# Altium PCB CreationByte_DevBoard_v1 PCB.PcbDoc (part 1 of 2)
Units mil, origin at the board's own origin, x right, y up, seen from the top; angles counter-clockwise.
Board outline 2480.32 x 787.4 mil, 2 copper layers (Top Layer, Bottom Layer), stack 38.583 mil thick; 69 components, 43 nets, 237 pads, 167 vias.
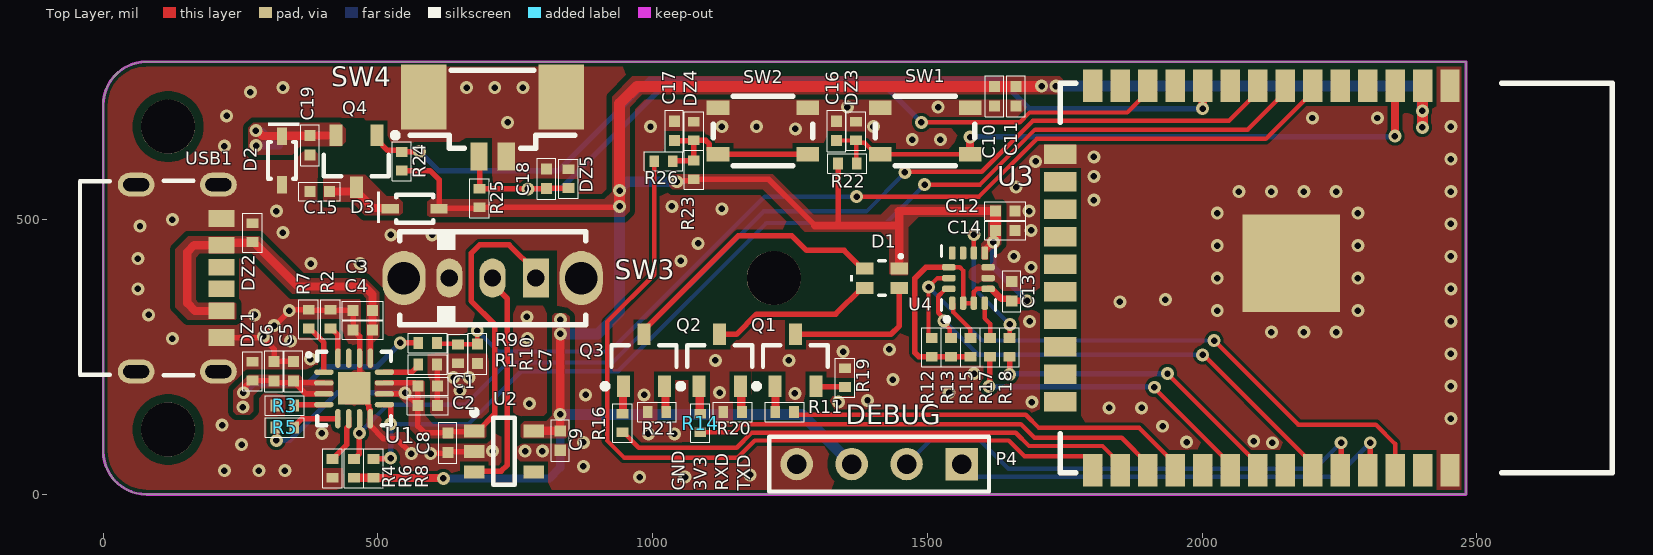
[diagram p0: Top Layer view]
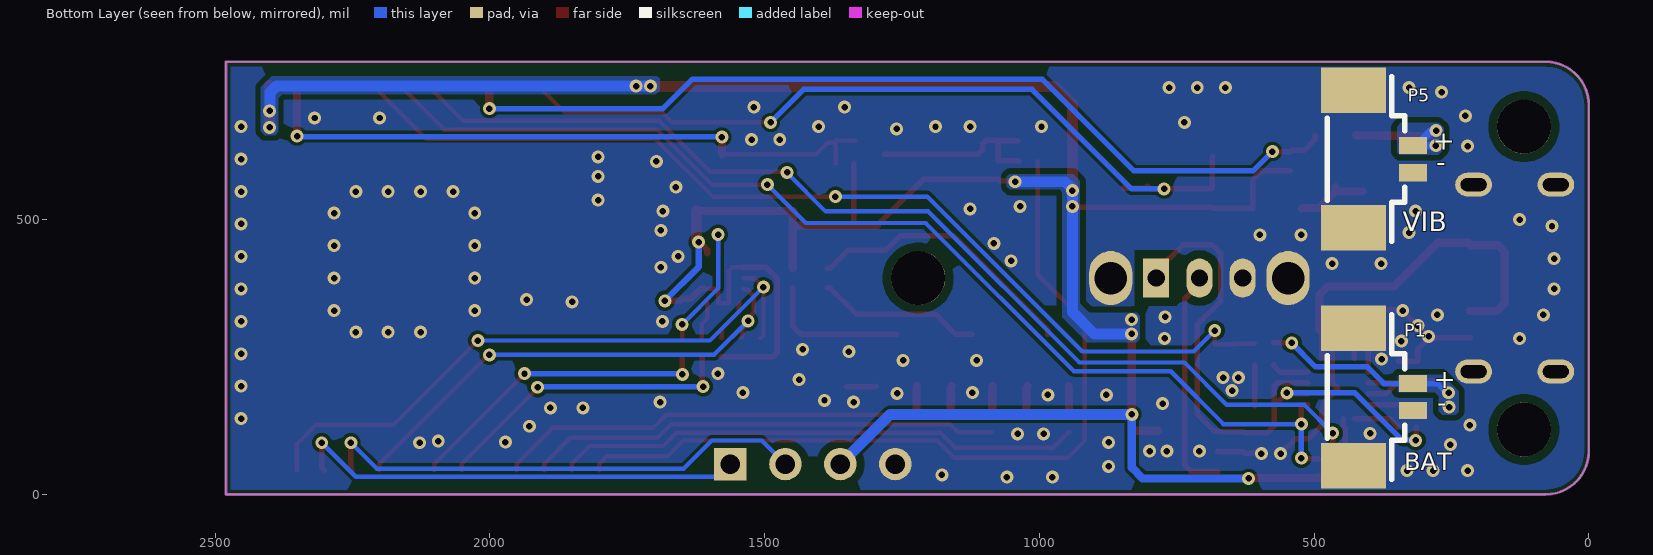
[diagram p1: Bottom Layer view, seen from below]
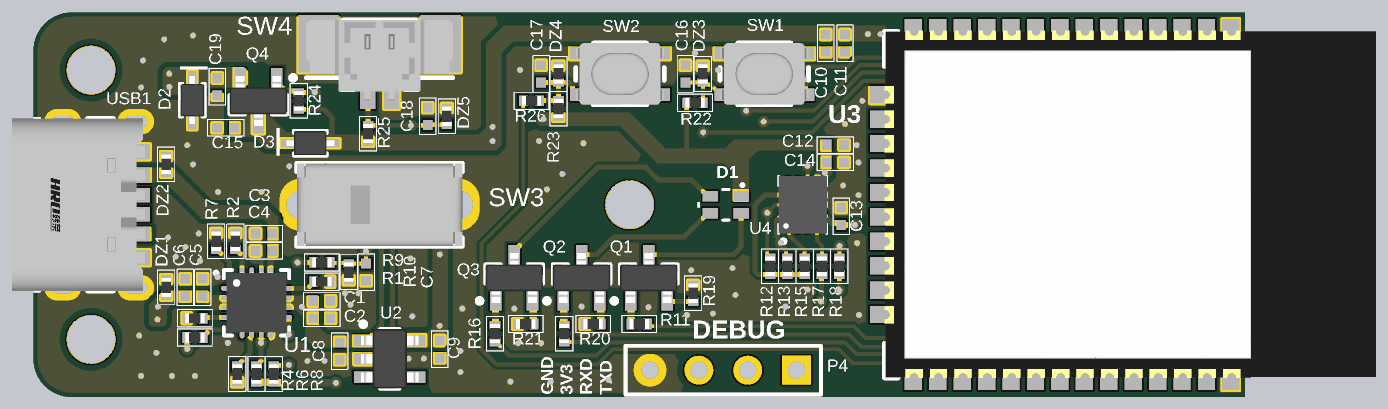
[diagram p2: 3D render of the assembled board from above, using the file's embedded part models]

## Layer stack, top to bottom
Top Solder: solder mask 0.4, Solder Resist, Dk 3.5
Top Layer: signal copper 1.378
Dielectric 1: dielectric 35.8268, FR-4, Dk 4.8
Bottom Layer: signal copper 1.378
Bottom Solder: solder mask 0.4, Solder Resist, Dk 3.5

## Board outline
78.74,0 cw(c78.74,78.74) 0,78.74 0,708.66 cw(c78.74,708.66) 78.74,787.4 2480.32,787.4 2480.32,0

## Design rules (kind name [scope] priority, off if disabled: settings)
Clearance Clearance_GND [InPolygonClass('GND')] p1: gap=6 ignorepadtopadclearanceinfootprint=FALSE except(8: SMDPad-Fill SMDPad-Poly SMDPad-Region; 10: Fill-Fill Fill-Poly Fill-Region Poly-Poly Poly-Region Region-Region; 15: THPad-Fill THPad-Poly THPad-Region)
Clearance [All] p2: gap=6 ignorepadtopadclearanceinfootprint=FALSE
ComponentClearance [All] p1: gap=10 collisioncheckmode=3 verticalgap=0 showdistances=FALSE
Height [All] p1: minheight=0 maxheight=1181.1 prefheight=500
HoleSize [All] p1: absolutevalues=TRUE maxlimit=393.7 minlimit=1 maxpercent=80.000 minpercent=20.000
HoleToHoleClearance [All] p1: gap=1 allowstackedmicrovias=TRUE
MinimumSolderMaskSliver [All] p1: minsoldermaskwidth=1
PolygonConnect [All] p1: connectstyle=Direct reliefconductorwidth=10 reliefentries=4 polygonreliefangle="90 Angle" airgapwidth=10
RoutingVias [All] p1: holewidth=11.81 width=23.62 viastyle="Through Hole" minholewidth=11.81 minwidth=23.62 maxholewidth=11.81 maxwidth=23.62
SilkToSilkClearance [All] p1: silktosilkclearance=1
SilkToSolderMaskClearance [IsPad] p1: minsilkscreentomaskgap=1 clearancetoexposedcopper=TRUE
SolderMaskExpansion [All] p1: expansion=4 istentingtop=FALSE
Width [All] p1: maxlimit=30 minlimit=8 preferedwidth=10
23 further rules are at their usual default settings.

## Classes and differential pairs
polygon class GND: GND_BOT GND_TOP
component class "Power Supply": C1 C2 C3 C4 C5 C6 C7 C8 C9 DZ1 DZ2 P1 P2 R1 R2 R3 R4 R5 R6 R7 R8 R9 R10 SW3 U1 U2 USB1
component class ESP32: C10 C11 C12 C13 C14 C15 C16 C17 C18 C19 D1 D2 D3 DZ3 DZ4 DZ5 P4 P5 Q1 Q2 Q3 Q4 R11 R12 R13 R14 R15 R16 R17 R18 R19 R20 R21 R22 R23 R24 R25 R26 SW1 SW2 SW4 U3 U4

## Components (designator, comment, footprint, x,y, rotation, side; value= is the part's Value field where it differs from the comment)
C1 "10uF" C0402M 590.55,196.85 r180 top
C2 "10uF" C0402M 590.55,161.42 r180 top
C3 "10uF" C0402M 472.44,334.65 r0 top
C4 "10uF" C0402M 472.44,299.21 r0 top
C5 "10uF" C0402M 346.46,224.41 r270 top
C6 "10uF" C0402M 311.02,224.41 r270 top
C7 "0.01uF" C0402M 681.1,255.91 r90 top
C8 "10uF" C0402M 627.09,94.1 r90 top
C9 "10uF" C0402M 831.81,98.04 r90 top
C10 "10uF" C0402M 1622.05,724.41 r90 top
C11 "0.1uF" C0402M 1661.42,724.41 r90 top
C12 "10uF" C0402M 1641.73,515.75 r180 top
C13 "0.1uF" C0402M 1653.54,370.08 r270 top
C14 "0.1uF" C0402M 1641.73,480.32 r180 top
C15 "10uF" C0402M 393.7,551.18 r0 top
C16 "0.1uF" C0402M 1334.65,661.42 r90 top
C17 "0.1uF" C0402M 1039.37,661.42 r90 top
C18 "0.1uF" C0402M 807.09,574.8 r90 top
C19 "0.1uF" C0402M 376.51,635.31 r90 top
D1 "19-237D/BHR6GHC-C01/2T" 19-237D/BHR6GHC-C01/2T 1417.32,393.7 r180 top
D2 "1N4148WS" SODFL250X70-2N 325.33,607.76 r90 top
D3 "B140WS-7" SODFL250X70-2N 566.93,519.68 r180 top
DZ1 "TPD1E10B06DPYR" R0402M 271.65,224.41 r270 top
DZ2 "TPD1E10B06DPYR" R0402M 271.65,476.38 r270 top
DZ3 "TPD1E10B06DPYR" R0402M 1370.08,661.42 r270 top
DZ4 "TPD1E10B06DPYR" R0402M 1074.8,661.42 r270 top
DZ5 "TPD1E10B06DPYR" R0402M 846.46,574.8 r270 top
P1 "0533980271" 0533980271 374.02,177.17 r90 bottom
P4 "Header 4" HDR1X4 1562.2,55.12 r180 top
P5 "0533980271" 0533980271 374.02,610.24 r90 bottom
Q1 "BC817-25-7-F" SOT95P245X110-3N 1259.84,244.09 r90 top
Q2 "BC817-25-7-F" SOT95P245X110-3N 1122.05,244.09 r90 top
Q3 "BC817-25-7-F" SOT95P245X110-3N 984.25,244.09 r90 top
Q4 "BC817-25-7-F" SOT95P245X110-3N 460.63,606.3 r270 top
R1 "1k" R0402M 590.55,236.22 r180 top
R2 "1k" R0402M 413.39,318.9 r270 top
R3 "10k" R0402M 330.71,161.42 r0 top
R4 "10k" R0402M 417.32,47.24 r90 top
R5 "10k" R0402M 330.71,122.05 r0 top
R6 "10k" R0402M 456.69,47.24 r90 top
R7 "10k" R0402M 374.02,318.9 r270 top
R8 "10k" R0402M 492.13,47.24 r90 top
R9 "100k" R0402M 590.55,275.59 r180 top
R10 "100k" R0402M 645.67,255.91 r90 top
R11 "1k" R0402M 1240.16,149.61 r180 top
R12 "10k" R0402M 1507.87,267.72 r270 top
R13 "10k" R0402M 1543.31,267.72 r270 top
R14 "1k" R0402M 1086.61,129.92 r90 top
R15 "10k" R0402M 1578.74,267.72 r270 top
R16 "1k" R0402M 944.88,129.92 r90 top
R17 "1k" R0402M 1614.17,267.72 r90 top
R18 "1k" R0402M 1649.61,267.72 r90 top
R19 "100R" R0402M 1350.39,212.6 r270 top
R20 "100R" R0402M 1145.67,149.61 r0 top
R21 "100R" R0402M 1007.87,149.61 r180 top
R22 "10k" R0402M 1354.33,602.36 r180 top
R23 "10k" R0402M 1074.8,590.55 r270 top
R24 "100k" R0402M 543.31,606.3 r270 top
R25 "10k" R0402M 685.04,539.37 r270 top
R26 "33R" R0402M 1019.69,606.3 r0 top
SW1 "PTS810SJK250SMTRLFS" PTS810SJG250SMTRLFS 1496.06,661.42 r180 top
SW2 "PTS810SJK250SMTRLFS" PTS810SJG250SMTRLFS 1200.79,661.42 r180 top
SW3 "OS102011MS2QN1" OS102011MS2QN1 708.66,393.7 r180 top locked
SW4 "0533980271" 0533980271 708.66,669.29 r0 top
U1 "BQ24074RGTR" QFN50P300X300X100_HS-17N 456.69,192.91 r0 top
U2 "XC6220B331MR-G" SOT95P280X145-5NP 729.45,78.35 r0 top
U3 "ESP32-WROOM-32D (16MB)" ESP32S 2244.09,393.7 r270 top
U4 "LSM6DSL" LSM6DSL 1574.8,393.7 r90 top
USB1 "TYPE-C-31-M-17" TYPE-C-31-M-17 137.8,393.7 r270 top locked

## Footprints (in the part's own frame and the unit in brackets; to place one, negate y for a bottom-side part, rotate by r counter-clockwise, add the part's x,y. Pads: shape width x height; smd on the part's side, far side on the other; paste and mask are expansions set on the pad)
19-237D/BHR6GHC-C01/2T [mm]
  rect 0.8x0.55 smd: 1(-0.8,-0.45) 2(-0.8,0.45) 3(0.8,0.45) 4(0.8,-0.45)
  silkscreen extent -0.89,-1.04 1.47,0.8, body extent -0.8,-0.75 0.8,0.75, height 0.34
0533980271 [mm]
  rect 2.1x3 smd: 0(-3.175,1.375) 0(3.175,1.375)
  rect 0.8x1.3 smd: 1(-0.625,-1.375) 2(0.625,-1.375)
  silkscreen extent -3.8,-1 3.8,2.6, body extent -3.82,-1.6 3.83,2.6, height 4.76
C0402M [mm] "Capacitor 0402"
  rect 0.51x0.51 smd: 1(-0.45,0) 2(0.45,0)
  silkscreen extent -0.95,-0.43 0.95,0.43, body extent -0.53,-0.28 0.53,0.27, height 0.55
ESP32S [mm]
  rect 4.5x4.5 smd: 0(-0.68,-2.08)
  rect 1.5x0.9 smd: 1(-8.9,5.26) 2(-8.9,3.99) 3(-8.9,2.72) 4(-8.9,1.45) 5(-8.9,0.18) 6(-8.9,-1.09) 7(-8.9,-2.36) 8(-8.9,-3.63) 9(-8.9,-4.9) 10(-8.9,-6.17) 11(-8.9,-7.44) 12(-8.9,-8.71) 13(-8.9,-9.98) 14(-8.9,-11.25) 25(8.89,-11.25) 26(8.89,-9.98) 27(8.89,-8.71) 28(8.89,-7.44) 29(8.89,-6.17) 30(8.89,-4.9) 31(8.89,-3.63) 32(8.89,-2.36) 33(8.89,-1.09) 34(8.89,0.18) 35(8.89,1.45) 36(8.89,2.72) 37(8.89,3.99) 38(8.89,5.26)
  rect 0.9x1.5 smd: 15(-5.72,-12.75) 16(-4.45,-12.75) 17(-3.18,-12.75) 18(-1.91,-12.75) 19(-0.64,-12.75) 20(0.63,-12.75) 21(1.9,-12.75) 22(3.17,-12.75) 23(4.44,-12.75) 24(5.71,-12.75)
  silkscreen extent -9,-12.75 9,12.75, body extent -9.05,-12.74 9.02,12.8, height 3
HDR1X4 [mm] "Connector; Header; 4 Position"
  rect 1.5x1.5 hole 0.9: 1(0,0)
  round 1.5 hole 0.9: 2(2.54,0) 3(5.08,0) 4(7.62,0)
  silkscreen extent -1.27,-1.27 8.89,1.27
LSM6DSL [mm]
  rrect50% 0.61x0.3 smd: 1(-1.16,0.75) 2(-1.16,0.25) 3(-1.16,-0.25) 4(-1.16,-0.75) 8(1.16,-0.75) 9(1.16,-0.25) 10(1.16,0.25) 11(1.16,0.75)
  rrect50% 0.3x0.61 smd: 5(-0.5,-0.91) 6(0,-0.91) 7(0.5,-0.91) 12(0.5,0.91) 13(0,0.91) 14(-0.5,0.91)
  silkscreen extent -2,-1.25 1.5,1.25, body extent -1.5,-1.25 1.5,1.25, height 0.86
OS102011MS2QN1 [mm]
  rect 1.2x1.8 hole 0.8: 1(-2,0)
  oval 1.2x1.8 hole 0.8: 2(0,0) 3(2,0)
  oval 2x2.5 hole 1.5: H1(-4.1,0) H2(4.1,0)
  silkscreen extent -4.3,-2.15 4.3,2.15, body extent -4.3,-2.15 4.3,2.15, height 8.71
PTS810SJG250SMTRLFS [mm]
  rect 1.05x0.65 smd: 1(-2.075,1.075) 2(2.075,1.075) 3(-2.075,-1.075) 4(2.075,-1.075)
  silkscreen extent -2.3,-1.6 2.3,1.6, body extent -2.29,-1.6 2.29,1.6, height 2.51
QFN50P300X300X100_HS-17N [mm] "QFN, 16-Leads, Body 3.00x3.00mm, Pitch 0.50mm, Thermal Pad 1.50x1.50mm, IPC Medium Density"
  oval 0.9x0.25 smd: 1(-1.4,0.75) 2(-1.4,0.25) 3(-1.4,-0.25) 4(-1.4,-0.75) 9(1.4,-0.75) 10(1.4,-0.25) 11(1.4,0.25) 12(1.4,0.75)
  oval 0.25x0.9 smd: 5(-0.75,-1.4) 6(-0.25,-1.4) 7(0.25,-1.4) 8(0.75,-1.4) 13(0.75,1.4) 14(0.25,1.4) 15(-0.25,1.4) 16(-0.75,1.4)
  rect 1.5x1.5 smd: 17(0,0)
  silkscreen extent -2.2,-1.7 1.7,1.7, body extent -1.57,-1.57 1.57,1.57, height 1
R0402M [mm] "Chip Resistor 0402"
  rect 0.45x0.55 smd: 1(-0.432,0) 2(0.432,0)
  silkscreen extent -0.9,-0.45 0.9,0.45, body extent -0.5,-0.25 0.5,0.25, height 0.4
SODFL250X70-2N [mm] "SODFL, 2-Leads, Body 1.25x2.50mm, IPC Medium Density"
  rect 0.8x0.45 smd: 1(-1.125,0) 2(1.125,0)
  silkscreen extent -0.85,-0.8 1.75,0.65, body extent -1.25,-0.63 1.25,0.63, height 0.7
SOT95P245X110-3N [mm] "SOT23, 3-Leads, Body 2.90x2.45mm, Pitch 0.95mm, IPC Medium Density"
  rect 1x0.6 smd: 1(-1.2,0.95) 2(-1.2,-0.95) 3(1.2,0)
  silkscreen extent -1.32,-1.5 0.7,1.92, body extent -1.3,-1.5 1.3,1.5, height 1.1
SOT95P280X145-5NP [mm] "SOT23, 5-Leads, Body 2.90x2.80mm, Pitch 0.95mm, IPC Medium Density"
  rect 0.95x0.6 smd: 1(-1.375,0.95) 2(-1.375,0) 3(-1.375,-0.95) 4(1.375,-0.95) 5(1.375,0.95)
  silkscreen extent -1.5,-1.55 0.5,1.92, body extent -1.5,-1.55 1.5,1.55, height 1.45
TYPE-C-31-M-17 [mm]
  oval 1.1x1.7 hole 0.6 slot 1.2 at 90 deg: 0(-4.32,1.825) 0(-4.32,-1.975) 0(4.32,1.825) 0(4.32,-1.975)
  rect 0.76x1.2 smd: A5(-0.5,1.975) A5(0.5,1.975) A9(1.52,1.975) B9(-1.52,1.975)
  rect 0.8x1.2 smd: A12(2.75,1.975) B12(-2.75,1.975)
  silkscreen extent -4.5,-4.57 4.5,0.67, body extent -4.47,-4.6 4.47,2.3, height 3.17

## Part data
C1 C2 C3 C4 C5 C6 C8 C9 C10 C12 C15: library part CAP_CER, "CAP CER 10UF 10V X5R 0402", Case Code (Imperial)=0402, Case Code (Metric)=1005, Manufacturer 1=Samsung, Manufacturer Part Number 1=CL05A106MP8NUB8, Max Operating Temperature=85°C, Min Operating Temperature=-55°C, Supplier Part Number 1=1276-6830-6-ND, Tolerance=20%, Voltage Rating=10V, Capacitance=10uF, Case/Package=0402, Category="Ceramic Capacitors", ComponentLink1Description=http://www.samsungsem.com/kr/support/product-search/mlcc/CL05A106MP8NUB8.jsp?src-supplier=Digi-Key, ComponentLink1URL=http://www.samsungsem.com/kr/support/product-search/mlcc/CL05A106MP8NUB8.jsp?src-supplier=Digi-Key, Length=0.039inch, Mount="Surface Mount", Mouting Technology=SMT, Packaging="Tape and Reel", Pin=2, Pricing 1="1=0.37000, 10=0.25800, 50=0.18040, 100=0.15460, 500=0.11598, 1000=0.09793, 2500=0.09278 (USD)", RoHS=Yes, RoHS Compliant=Yes, Stock 1=5372550, Supplier 1=Digi-Key, Thickness=0.035inch, Width=0.02inch
C7: library part CAP_CER, "CAP CER 10000PF 25V X7R 0402", Capacitance=10nF, Case Code (Imperial)=0402, Case Code (Metric)=1005, Dielectric=X7R, Manufacturer=Samsung, Manufacturer Part Number=CL05B103KA5NNNC, Max Operating Temperature=125°C, Min Operating Temperature=-55°C, Package Quantity=1, Supplier Part Number 1=1276-1057-1-ND, Tolerance=10%, Voltage Rating=25V, Case/Package=0402, ComponentLink1Description=https://datasheet.ciiva.com/11586/upy-gphc-x7r-6-3v-to-50v-8-11586326.pdf?src-supplier=Avnet, ComponentLink1URL=https://datasheet.ciiva.com/11586/upy-gphc-x7r-6-3v-to-50v-8-11586326.pdf?src-supplier=Avnet, ComponentLink2Description=https://datasheet.ciiva.com/17434/upy-gphc-x7r-6-3v-to-50v-8-17434572.pdf?src-supplier=Avnet+Europe, ComponentLink2URL=https://datasheet.ciiva.com/17434/upy-gphc-x7r-6-3v-to-50v-8-17434572.pdf?src-supplier=Avnet+Europe, ComponentLink3Description=https://datasheet.ciiva.com/15195/getdatasheetpartid-358612-15195635.pdf?src-supplier=Verical, ComponentLink3URL=https://datasheet.ciiva.com/15195/getdatasheetpartid-358612-15195635.pdf?src-supplier=Verical, ComponentLink4Description=https://datasheet.ciiva.com/16740/cl05b104kq5nnnc-16740683.pdf?src-supplier=Future+Electronics, ComponentLink4URL=https://datasheet.ciiva.com/16740/cl05b104kq5nnnc-16740683.pdf?src-supplier=Future+Electronics, Contact Plating=Tin, Depth=0.5mm, Height=0.5mm, Length=1mm, Mount="Surface Mount", Packaging="Tape and Reel", Pricing 1="1 = 0.10000, 10 = 0.01800, 50 = 0.00960, 100 = 0.00780, 500 = 0.00558, 1000 = 0.00439, 2500 = 0.00399, 5000 = 0.00367 (USD)", Radiation Hardening=No, RoHS=Yes, Stock 1=2714388, Supplier 1=Digi-Key, Thickness=0.022inch, Width=0.02inch
C11 C13 C14 C16 C17 C18 C19: library part CAP_CER, "CAP CER 0.1UF 50V X7R 0402", Capacitance=100nF, Case Code (Imperial)=0402, Case Code (Metric)=1005, Dielectric=X7R, Dielectric Material=Ceramic, Manufacturer=Murata, Manufacturer Part Number=GRM155R71H104KE14D, Max Operating Temperature=125°C, Min Operating Temperature=-55°C, Package Quantity=10000, Supplier Part Number 1=490-10700-1-ND, Tolerance=10%, Voltage=50V, Case/Package=0402, ComponentLink1Description=https://datasheet.ciiva.com/25741/cl10b104kb8nnnl-25741341.pdf?src-supplier=Digi-Key, ComponentLink1URL=https://datasheet.ciiva.com/25741/cl10b104kb8nnnl-25741341.pdf?src-supplier=Digi-Key, ComponentLink2Description=https://datasheet.ciiva.com/26838/getdatasheetpartid-357523-26838415.pdf?src-supplier=Verical, ComponentLink2URL=https://datasheet.ciiva.com/26838/getdatasheetpartid-357523-26838415.pdf?src-supplier=Verical, ComponentLink3Description=http://www.farnell.com/datasheets/2079156.pdf?src-supplier=Farnell, ComponentLink3URL=http://www.farnell.com/datasheets/2079156.pdf?src-supplier=Farnell, ComponentLink4Description=http://www.mouser.com/ds/2/281/c02e-2905.pdf?src-supplier=Mouser, ComponentLink4URL=http://www.mouser.com/ds/2/281/c02e-2905.pdf?src-supplier=Mouser, ComponentLink5Description=http://components.arrow.com/part/dataview/0323_07030614?src-supplier=Arrow+Europe, ComponentLink5URL=http://components.arrow.com/part/dataview/0323_07030614?src-supplier=Arrow+Europe, ComponentLink6Description=https://search.murata.co.jp/Ceramy/image/img/A01X/G101/ENG/GRM155R71H104KE14-01.pdf?src-supplier=Digi-Key, ComponentLink6URL=https://search.murata.co.jp/Ceramy/image/img/A01X/G101/ENG/GRM155R71H104KE14-01.pdf?src-supplier=Digi-Key, ComponentLink7Description=http://psearch.en.murata.com/capacitor/product/GRM155R71H104KE14%23.pdf?src-supplier=Avnet, ComponentLink7URL=http://psearch.en.murata.com/capacitor/product/GRM155R71H104KE14%23.pdf?src-supplier=Avnet, ComponentLink8Description=http://www.farnell.com/datasheets/2079156.pdf?src-supplier=Element14, ComponentLink8URL=http://www.farnell.com/datasheets/2079156.pdf?src-supplier=Element14, ComponentLink9Description=http://www.farnell.com/datasheets/2079156.pdf?src-supplier=Newark, ComponentLink9URL=http://www.farnell.com/datasheets/2079156.pdf?src-supplier=Newark, Composition=Ceramic, Depth=0.5mm, Dissipation Factor=0.025%, Height=0.5mm, Lead Free="Lead Free", Length=1mm, Material=Ceramic, Mount="Surface Mount", Packaging="Tape and Reel", Pricing 1="1 = 0.10000, 10 = 0.04600, 100 = 0.02050, 500 = 0.01464, 1000 = 0.01150, 2500 = 0.01045, 5000 = 0.00961 (USD)", REACH SVHC="No SVHC", RoHS=Yes, Stock 1=2282266, Supplier 1=Digi-Key, Termination=SMD/SMT, Thickness=0.022inch, Voltage Rating=50V, Voltage Rating (DC)=50V, Weight=0.000212oz, Width=0.5mm
D1: "LED RGB CLEAR 4SMD", Manufacturer 1=Everlight, Manufacturer Part Number 1=19-237D/BHR6GHC-C01/2T, Pricing 1="6000=0.27010, 8000=0.26740, 10000=0.26470, 12000=0.26210, 20000=0.25950, 24000=0.25690, 25000=0.25430, 30000=0.25180, 50000=0.24920 (USD)", Supplier 1="Arrow Electronics", Supplier Part Number 1=19-237D/BHR6GHC-C01/2T
D2: library part "D Schottky", "DIODE GEN PURP 75V 150MA SOD323F", Average Rectified Current=150mA, Forward Voltage=1V, Manufacturer="ON Semiconductor / Fairchild", Max Forward Surge Current (Ifsm)=2A, Max Operating Temperature=150°C, Max Repetitive Reverse Voltage (Vrrm)=75V, Min Operating Temperature=-55°C, Package Quantity=1, Peak Reverse Current=5uA, Power Dissipation=200mW, Supplier Part Number 1=1N4148WSFSCT-ND, ComponentLink1Description=http://www.mccsemi.com/up_pdf/1N4148X(SOD-523).PDF?src-supplier=Digi-Key, ComponentLink1URL=http://www.mccsemi.com/up_pdf/1N4148X(SOD-523).PDF?src-supplier=Digi-Key, ComponentLink2Description=http://www.mouser.com/ds/2/258/1N4148X(SOD-523)-349105.pdf?src-supplier=Mouser, ComponentLink2URL=http://www.mouser.com/ds/2/258/1N4148X(SOD-523)-349105.pdf?src-supplier=Mouser, ComponentLink3Description=http://www.mccsemi.com/up_pdf/1N4148X(SOD-523).PDF?src-supplier=Future+Electronics, ComponentLink3URL=http://www.mccsemi.com/up_pdf/1N4148X(SOD-523).PDF?src-supplier=Future+Electronics, ComponentLink4Description=https://datasheet.ciiva.com/16303/ds30217-16303296.pdf?src-supplier=Future+Electronics, ComponentLink4URL=https://datasheet.ciiva.com/16303/ds30217-16303296.pdf?src-supplier=Future+Electronics, ComponentLink5Description=https://datasheet.ciiva.com/27092/1538419-27092484.pdf?src-supplier=Jameco, ComponentLink5URL=https://datasheet.ciiva.com/27092/1538419-27092484.pdf?src-supplier=Jameco, ComponentLink6Description=https://datasheet.ciiva.com/912/ds30217-912801.pdf?src-supplier=Digi-Key, ComponentLink6URL=https://datasheet.ciiva.com/912/ds30217-912801.pdf?src-supplier=Digi-Key, ComponentLink7Description=https://datasheet.ciiva.com/1177/ds30217-1177089.pdf?src-supplier=Element14, ComponentLink7URL=https://datasheet.ciiva.com/1177/ds30217-1177089.pdf?src-supplier=Element14, ComponentLink8Description=https://datasheet.ciiva.com/912/ds30217-912802.pdf?src-supplier=Digi-Key, ComponentLink8URL=https://datasheet.ciiva.com/912/ds30217-912802.pdf?src-supplier=Digi-Key, ComponentLink9Description=https://datasheet.ciiva.com/912/ds30217-912803.pdf?src-supplier=Digi-Key, ComponentLink9URL=https://datasheet.ciiva.com/912/ds30217-912803.pdf?src-supplier=Digi-Key, ComponentLink10Description=https://datasheet.ciiva.com/8303/ds30217-8303132.pdf?src-supplier=Avnet, ComponentLink10URL=https://datasheet.ciiva.com/8303/ds30217-8303132.pdf?src-supplier=Avnet, ComponentLink11Description=https://datasheet.ciiva.com/25919/ds30217-25919644.pdf?src-supplier=Avnet+Europe, ComponentLink11URL=https://datasheet.ciiva.com/25919/ds30217-25919644.pdf?src-supplier=Avnet+Europe, ComponentLink12Description=https://datasheet.ciiva.com/25968/1n914bws-25968945.pdf?src-supplier=Avnet+Europe, ComponentLink12URL=https://datasheet.ciiva.com/25968/1n914bws-25968945.pdf?src-supplier=Avnet+Europe, ComponentLink13Description=https://datasheet.ciiva.com/30479/0900766b810e1cd3-30479206.pdf?src-supplier=RSComponents, ComponentLink13URL=https://datasheet.ciiva.com/30479/0900766b810e1cd3-30479206.pdf?src-supplier=RSComponents, ComponentLink14Description=https://datasheet.ciiva.com/910/1n4148ws-910381.pdf?src-supplier=Digi-Key, ComponentLink14URL=https://datasheet.ciiva.com/910/1n4148ws-910381.pdf?src-supplier=Digi-Key, ComponentLink15Description=https://datasheet.ciiva.com/15208/getdatasheetpartid-127819-15208358.pdf?src-supplier=Verical, ComponentLink15URL=https://datasheet.ciiva.com/15208/getdatasheetpartid-127819-15208358.pdf?src-supplier=Verical, ComponentLink16Description=https://datasheet.ciiva.com/8300/1n914bws-8300360.pdf?src-supplier=Avnet, ComponentLink16URL=https://datasheet.ciiva.com/8300/1n914bws-8300360.pdf?src-supplier=Avnet, ComponentLink17Description=https://datasheet.ciiva.com/910/1n4148ws-910380.pdf?src-supplier=Digi-Key, ComponentLink17URL=https://datasheet.ciiva.com/910/1n4148ws-910380.pdf?src-supplier=Digi-Key, ComponentLink18Description=https://datasheet.ciiva.com/910/1n4148ws-910382.pdf?src-supplier=Digi-Key, ComponentLink18URL=https://datasheet.ciiva.com/910/1n4148ws-910382.pdf?src-supplier=Digi-Key, Contact Plating=Tin,Matte, Element Configuration=Single, Forward Current=150mA, Height=1mm, Lead Free="Lead Free", Length=1.8mm, Manufacturer Part Number=1N4148WS, Max Reverse Voltage (DC)=75V, Mount="Surface Mount", Number of Pins=2, Packaging="Tape and Reel", Pricing 1="1 = 0.16000, 10 = 0.14000, 100 = 0.06610, 500 = 0.03920, 1000 = 0.02576 (USD)", Radiation Hardening=No, REACH SVHC="No SVHC", Recovery Time=4ns, Reverse Recovery Time=4ns, Reverse Voltage=75V, RoHS=Yes, Stock 1=252106, Supplier 1=Digi-Key, Weight=0.0276g, Width=1.35mm
D3: library part "D Schottky", "DIODE SCHOTTKY 40V 1A SOD323", Average Rectified Current=1A, Forward Voltage=620mV, Manufacturer 1=Diodes, Max Forward Surge Current (Ifsm)=3A, Max Operating Temperature=125°C, Max Repetitive Reverse Voltage (Vrrm)=40V, Max Reverse Current=50uA, Min Operating Temperature=-40°C, Natural Thermal Resistance=426°C/W, Package Quantity=3000, Supplier Part Number 1=B140WS-7DICT-ND, Category="Rectifier Diodes", ComponentLink1Description=https://datasheet.ciiva.com/13064/ds31543-56649-13064032.pdf?src-supplier=Mouser, ComponentLink1URL=https://datasheet.ciiva.com/13064/ds31543-56649-13064032.pdf?src-supplier=Mouser, ComponentLink2Description=https://datasheet.ciiva.com/18567/ds31543-18567697.pdf?src-supplier=Digi-Key, ComponentLink2URL=https://datasheet.ciiva.com/18567/ds31543-18567697.pdf?src-supplier=Digi-Key, ComponentLink3Description=https://datasheet.ciiva.com/25946/ds31543-25946915.pdf?src-supplier=Avnet+Europe, ComponentLink3URL=https://datasheet.ciiva.com/25946/ds31543-25946915.pdf?src-supplier=Avnet+Europe, Contact Plating=Tin,Matte, Element Configuration=Single, Forward Current=1A, Height=1.1mm, Length=1.8mm, Manufacturer Part Number 1=B140WS-7, Max Reverse Voltage (DC)=40V, Mount="Surface Mount", Number of Pins=2, Packaging="Tape and Reel", Peak Non-Repetitive Surge Current=3A, Pricing 1="1=0.43000, 10=0.32200, 100=0.20060, 500=0.13728, 1000=0.10560 (USD)", RoHS=Yes, RoHS Compliant=Yes, Series=-, Stock 1=30918, Supplier 1=Digi-Key, Weight=0.000173oz, Width=1.4mm
DZ1 DZ2 DZ3 DZ4 DZ5: library part "D Zener", "TVS DIODE 5.5V 14V 2X1SON", Breakdown Voltage=6V, Capacitance=12pF, Case/Package=0402, Clamping Voltage=14V, Leakage Current=100nA, Manufacturer="Texas Instruments", Max Operating Temperature=125°C, Min Operating Temperature=-40°C, Package Quantity=1, Peak Pulse Current=5A, Peak Pulse Power=90W, Power Line Protection=No, Resistor Type=Zener, Reverse Standoff Voltage=5.5V, Supplier Part Number 1=296-30406-1-ND, Test Current=1mA, ComponentLink1Description=https://datasheet.ciiva.com/26005/sllseb1b-26005840.pdf?src-supplier=Avnet+Europe, ComponentLink1URL=https://datasheet.ciiva.com/26005/sllseb1b-26005840.pdf?src-supplier=Avnet+Europe, ComponentLink2Description=https://datasheet.ciiva.com/46384/1877100-46384054.pdf?src-supplier=Element14, ComponentLink2URL=https://datasheet.ciiva.com/46384/1877100-46384054.pdf?src-supplier=Element14, ComponentLink3Description=https://datasheet.ciiva.com/14195/tpd1e10b06-14195178.pdf?src-supplier=Avnet, ComponentLink3URL=https://datasheet.ciiva.com/14195/tpd1e10b06-14195178.pdf?src-supplier=Avnet, ComponentLink4Description=https://datasheet.ciiva.com/22691/1877100-22691786.pdf?src-supplier=Element14, ComponentLink4URL=https://datasheet.ciiva.com/22691/1877100-22691786.pdf?src-supplier=Element14, ComponentLink5Description=https://datasheet.ciiva.com/2961/tpd1e10b06-2961245.pdf?src-supplier=Digi-Key, ComponentLink5URL=https://datasheet.ciiva.com/2961/tpd1e10b06-2961245.pdf?src-supplier=Digi-Key, ComponentLink6Description=https://datasheet.ciiva.com/2961/tpd1e10b06-2961246.pdf?src-supplier=Digi-Key, ComponentLink6URL=https://datasheet.ciiva.com/2961/tpd1e10b06-2961246.pdf?src-supplier=Digi-Key, ComponentLink7Description=https://datasheet.ciiva.com/6574/tpd1e10b06-6574654.pdf?src-supplier=Digi-Key, ComponentLink7URL=https://datasheet.ciiva.com/6574/tpd1e10b06-6574654.pdf?src-supplier=Digi-Key, Contact Plating=Gold, Direction=Bidirectional, Element Configuration=Single, ESD Protection=Yes, Height=0.35mm, Interface=GPIO, Lead Free="Lead Free", Length=1.1mm, Manufacturer Part Number=TPD1E10B06DPYR, Max Reverse Leakage Current=100nA, Min Breakdown Voltage=6V, Number of Bidirectional Channels=1, Number of Channels=1, Number of Pins=2, Packaging="Tape and Reel", Pricing 1="1 = 0.45000, 10 = 0.29400, 100 = 0.16380, 500 = 0.10920, 1000 = 0.07560, 5000 = 0.07350 (USD)", Radiation Hardening=No, REACH SVHC="No SVHC", RoHS=Yes, Stock 1=555750, Supplier 1=Digi-Key, Width=0.7mm, Working Voltage=5.5V
P1 P5 SW4: library part "Header 2", "CONN HEADER SMD 2POS 1.25MM", Color=Natural, Contact Resistance=20mR, Current Rating=1A, Flammability Rating="UL94 V-0", Insulation Resistance=100MR, Manufacturer 1=Molex, Manufacturer Part Number 1=53398-0271, Max Operating Temperature=85°C, Min Operating Temperature=-40°C, Package Quantity=1000, Supplier Part Number 1=WM7606CT-ND, Voltage Rating=125V, Category="Headers and Wire Housings", ComponentLink1Description=https://datasheet.ciiva.com/7167/1626130-7167520.pdf?src-supplier=Newark, ComponentLink1URL=https://datasheet.ciiva.com/7167/1626130-7167520.pdf?src-supplier=Newark, ComponentLink2Description=https://datasheet.ciiva.com/7920/1841150-7920834.pdf?src-supplier=Element14, ComponentLink2URL=https://datasheet.ciiva.com/7920/1841150-7920834.pdf?src-supplier=Element14, ComponentLink3Description=https://datasheet.ciiva.com/14156/gf116833-116846-e-14156243.pdf?src-supplier=Distrelec, ComponentLink3URL=https://datasheet.ciiva.com/14156/gf116833-116846-e-14156243.pdf?src-supplier=Distrelec, ComponentLink4Description=https://datasheet.ciiva.com/36178/1932619-36178944.pdf?src-supplier=Jameco, ComponentLink4URL=https://datasheet.ciiva.com/36178/1932619-36178944.pdf?src-supplier=Jameco, ComponentLink5Description=https://datasheet.ciiva.com/28523/1759360-28523372.pdf?src-supplier=Element14, ComponentLink5URL=https://datasheet.ciiva.com/28523/1759360-28523372.pdf?src-supplier=Element14, ComponentLink6Description=https://datasheet.ciiva.com/9468/0533980271-pcb-headers-9468512.pdf?src-supplier=Avnet, ComponentLink6URL=https://datasheet.ciiva.com/9468/0533980271-pcb-headers-9468512.pdf?src-supplier=Avnet, ComponentLink7Description=https://datasheet.ciiva.com/30229/225140533980271-pcb-headers-30229043.pdf?src-supplier=Onlinecomponents.com, ComponentLink7URL=https://datasheet.ciiva.com/30229/225140533980271-pcb-headers-30229043.pdf?src-supplier=Onlinecomponents.com, ComponentLink8Description=https://datasheet.ciiva.com/5150/0533980271-pcb-headers-146564-5150549.pdf?src-supplier=Mouser, ComponentLink8URL=https://datasheet.ciiva.com/5150/0533980271-pcb-headers-146564-5150549.pdf?src-supplier=Mouser, ComponentLink9Description=https://datasheet.ciiva.com/11746/0900766b80ab946a-11746463.pdf?src-supplier=RSComponents, ComponentLink9URL=https://datasheet.ciiva.com/11746/0900766b80ab946a-11746463.pdf?src-supplier=RSComponents, ComponentLink10Description=https://datasheet.ciiva.com/22707/1867379-22707654.pdf?src-supplier=Element14, ComponentLink10URL=https://datasheet.ciiva.com/22707/1867379-22707654.pdf?src-supplier=Element14, ComponentLink11Description=https://datasheet.ciiva.com/22683/1626130-22683563.pdf?src-supplier=Element14, ComponentLink11URL=https://datasheet.ciiva.com/22683/1626130-22683563.pdf?src-supplier=Element14, ComponentLink12Description=https://datasheet.ciiva.com/16658/0533980271-pcb-headers-16658429.pdf?src-supplier=Avnet+Europe, ComponentLink12URL=https://datasheet.ciiva.com/16658/0533980271-pcb-headers-16658429.pdf?src-supplier=Avnet+Europe, ComponentLink13Description=https://datasheet.ciiva.com/18454/70090670-18454279.pdf?src-supplier=Allied+Electronics, ComponentLink13URL=https://datasheet.ciiva.com/18454/70090670-18454279.pdf?src-supplier=Allied+Electronics, Contact Material=Bronze,Brass,Tin, Contact Plating=Tin, Contact Type="Blade Pin", Depth=4.2mm, Gender=Male, Glow Wire Compliant=Non-compliant, Housing Color=Natural, Housing Material=Nylon, LatestRevisionDate=17-Jul-2002, LatestRevisionNote="Re-released for DXP Platform.", Lead Free="Lead Free", Mount="Surface Mount", Number of Circuits=2, Number of Contacts=2, Number of Positions=2, Number of Rows=1, Orientation=Vertical, Packaging="Tape and Reel", Pitch=1.25mm, Pricing 1="1=0.53000, 10=0.44900, 100=0.34940 (USD)", Publisher="Altium Limited", Radiation Hardening=No, REACH SVHC=Unknown, RoHS=Yes, RoHS Compliant=Yes, Series=PicoBlade, Stock 1=417, Supplier 1=Digi-Key, Termination=Solder, Voltage Rating (AC)=125V, Voltage Rating (DC)=125V, Working Voltage=125V
P4: "Header, 4-Pin", LatestRevisionDate=17-Jul-2002, LatestRevisionNote="Re-released for DXP Platform.", Publisher="Altium Limited"
Q1 Q2 Q3 Q4: library part MMBT3904-7-F, "TRANS NPN 45V 500MA SOT23-3", Case/Package=SOT-23, Collector Base Voltage (VCBO)=50V, Collector Emitter Breakdown Voltage=45V, Collector Emitter Saturation Voltage=700mV, Emitter Base Voltage (VEBO)=5V, Frequency=100MHz, Manufacturer=Diodes, Max Breakdown Voltage=150V, Max Collector Current=800mA, Max Operating Temperature=150°C, Max Power Dissipation=310mW, Min Operating Temperature=-65°C, Package Quantity=3000, Power Dissipation=350mW, Supplier Part Number 1=BC817-25FDICT-ND, Collector Emitter Voltage (VCEO)=45V, ComponentLink1Description=https://datasheet.ciiva.com/15139/getdatasheetpartid-233998-15139790.pdf?src-supplier=Verical, ComponentLink1URL=https://datasheet.ciiva.com/15139/getdatasheetpartid-233998-15139790.pdf?src-supplier=Verical, Contact Plating=Tin, Element Configuration=Single, Gain Bandwidth Product=100MHz, Height=1mm, Lead Free="Lead Free", Length=3.05mm, Manufacturer 1=Diodes, Manufacturer Part Number=BC817-25-7-F, Manufacturer Part Number 1=BC817-25-7-F, Max Frequency=100MHz, Mount="Surface Mount", Number of Elements=1, Number of Pins=3, Packaging="Tape and Reel", Polarity=NPN, Pricing 1="1 = 0.20000, 10 = 0.16300, 25 = 0.13640, 100 = 0.06670, 250 = 0.06560, 500 = 0.05560, 1000 = 0.03863 (USD)", Radiation Hardening=No, REACH SVHC="No SVHC", RoHS=Yes, Stock 1=52922, Supplier 1=Digi-Key, Transition Frequency=100MHz, Weight=0.000282oz, Width=1.4mm
R1 R2 R11 R14 R16 R17 R18: library part RES_SMD, "RES SMD 1K OHM 1% 1/16W 0402", Case Code (Imperial)=0402, Case Code (Metric)=1005, Manufacturer 1=Yageo, Manufacturer Part Number 1=RC0402FR-071KL, Max Operating Temperature=155°C, Max Power Dissipation=63mW, Min Operating Temperature=-55°C, Power Rating=62.5mW, Resistance=1kR, Resistance Tolerance=1%, Resistor Type="Thick Film", Supplier Part Number 1=311-1.00KLRCT-ND, Temperature Coefficient=100ppm/°C, Voltage Rating=50V, Case/Package=0402, Category="Chip SMD Resistors", ComponentLink1Description=https://datasheet.ciiva.com/11819/0900766b80c66297-11819477.pdf?src-supplier=RSComponents, ComponentLink1URL=https://datasheet.ciiva.com/11819/0900766b80c66297-11819477.pdf?src-supplier=RSComponents, ComponentLink2Description=https://datasheet.ciiva.com/7983/1018594-7983502.pdf?src-supplier=Element14, ComponentLink2URL=https://datasheet.ciiva.com/7983/1018594-7983502.pdf?src-supplier=Element14, ComponentLink3Description=https://datasheet.ciiva.com/22747/1018594-22747513.pdf?src-supplier=Element14, ComponentLink3URL=https://datasheet.ciiva.com/22747/1018594-22747513.pdf?src-supplier=Element14, ComponentLink4Description=https://datasheet.ciiva.com/12666/pyu-rc0402-51-rohs-l-6-r-12666741.pdf?src-supplier=Mouser, ComponentLink4URL=https://datasheet.ciiva.com/12666/pyu-rc0402-51-rohs-l-6-r-12666741.pdf?src-supplier=Mouser, ComponentLink5Description=https://datasheet.ciiva.com/7849/1018594-7849869.pdf?src-supplier=Element14, ComponentLink5URL=https://datasheet.ciiva.com/7849/1018594-7849869.pdf?src-supplier=Element14, ComponentLink6Description=https://datasheet.ciiva.com/7849/1018594-7849871.pdf?src-supplier=Element14, ComponentLink6URL=https://datasheet.ciiva.com/7849/1018594-7849871.pdf?src-supplier=Element14, ComponentLink7Description=https://datasheet.ciiva.com/17063/pyu-rc0402-51-rohs-l-6-r-17063193.pdf?src-supplier=Future+Electronics, ComponentLink7URL=https://datasheet.ciiva.com/17063/pyu-rc0402-51-rohs-l-6-r-17063193.pdf?src-supplier=Future+Electronics, Construction=Rectangular, Depth=0.5mm, Features="Moisture Resistant", Height=0.32mm, Lead Free="Lead Free", Length=1mm, Military Standard=Not, Mouting Technology=SMT, Number of Pins=2, Number of Terminations=2, Packaging="Tape and Reel", Pin=2, Pricing 1="1=0.10000, 10=0.01600, 100=0.00660, 1000=0.00299, 2500=0.00259, 5000=0.00214 (USD)", REACH SVHC=Unknown, RoHS=Yes, RoHS Compliant=Yes, Series=RC, Size Code=0402, Supplier 1=Digi-Key, Technology="THICK FILM", Termination=SMD/SMT, Tolerance=1%, Voltage Rating (DC)=50V, Width=0.5mm
R3 R4 R5 R6 R7 R8 R12 R13 R15 R22 R23 R25: library part RES_SMD, "RES SMD 10K OHM 1% 1/16W 0402", Case Code (Imperial)=0402, Case Code (Metric)=1005, Manufacturer=Yageo, Manufacturer Part Number=RC0402FR-0710KL, Max Operating Temperature=155°C, Min Operating Temperature=-55°C, Power Rating=62.5mW, Resistance=10kR, Supplier Part Number 1=311-10.0KLRTR-ND, Temperature Coefficient=100ppm/°C, Tolerance=1%, Voltage Rating=50V, Case/Package=0402, ComponentLink1Description=https://datasheet.ciiva.com/7660/38568-7660787.pdf?src-supplier=Element14, ComponentLink1URL=https://datasheet.ciiva.com/7660/38568-7660787.pdf?src-supplier=Element14, ComponentLink2Description=https://datasheet.ciiva.com/7849/1784430-7849813.pdf?src-supplier=Element14, ComponentLink2URL=https://datasheet.ciiva.com/7849/1784430-7849813.pdf?src-supplier=Element14, ComponentLink3Description=https://datasheet.ciiva.com/7849/1686128-7849814.pdf?src-supplier=Element14, ComponentLink3URL=https://datasheet.ciiva.com/7849/1686128-7849814.pdf?src-supplier=Element14, ComponentLink4Description=https://datasheet.ciiva.com/7849/1784430-7849815.pdf?src-supplier=Element14, ComponentLink4URL=https://datasheet.ciiva.com/7849/1784430-7849815.pdf?src-supplier=Element14, ComponentLink5Description=https://datasheet.ciiva.com/22747/1018594-22747512.pdf?src-supplier=Element14, ComponentLink5URL=https://datasheet.ciiva.com/22747/1018594-22747512.pdf?src-supplier=Element14, ComponentLink6Description=https://datasheet.ciiva.com/12667/pyu-rc0402-51-rohs-l-6-r-12667067.pdf?src-supplier=Mouser, ComponentLink6URL=https://datasheet.ciiva.com/12667/pyu-rc0402-51-rohs-l-6-r-12667067.pdf?src-supplier=Mouser, ComponentLink7Description=https://datasheet.ciiva.com/7983/1018594-7983486.pdf?src-supplier=Element14, ComponentLink7URL=https://datasheet.ciiva.com/7983/1018594-7983486.pdf?src-supplier=Element14, Composition="Thick Film", Depth=0.5mm, Height=0.32mm, Lead Free="Lead Free", Lead Pitch=0.2mm, Length=1mm, Military Standard=Not, Number of Pins=2, Number of Terminations=2, Packaging="Tape and Reel", Pricing 1="10000 = 0.001630, 30000 = 0.001440, 50000 = 0.001320, 100000 = 0.001290 (USD)", REACH SVHC="No SVHC", RoHS=Yes, Stock 1=58760000, Supplier 1=Digi-Key, Termination=SMD/SMT, Voltage Rating (DC)=50V, Width=0.5mm, Working Voltage=50V
R9 R10 R24: library part RES_SMD, "RES SMD 100K OHM 1% 1/16W 0402", Case Code (Imperial)=0402, Case Code (Metric)=1005, Manufacturer=Yageo, Manufacturer Part Number=RC0402FR-07100KL, Max Operating Temperature=155°C, Max Power Dissipation=63mW, Min Operating Temperature=-55°C, Package Quantity=1, Resistance=100kR, Resistor Type="Thick Film", Supplier Part Number 1=311-100KJRCT-ND, Temperature Coefficient=100ppm/°C, Tolerance=1%, Voltage Rating=50V, Case/Package=0402, ComponentLink1Description=https://datasheet.ciiva.com/11808/0900766b80f96399-11808107.pdf?src-supplier=RSComponents, ComponentLink1URL=https://datasheet.ciiva.com/11808/0900766b80f96399-11808107.pdf?src-supplier=RSComponents, ComponentLink2Description=https://datasheet.ciiva.com/7983/443971-7983593.pdf?src-supplier=Element14, ComponentLink2URL=https://datasheet.ciiva.com/7983/443971-7983593.pdf?src-supplier=Element14, ComponentLink3Description=https://datasheet.ciiva.com/46440/1868787-46440889.pdf?src-supplier=Element14, ComponentLink3URL=https://datasheet.ciiva.com/46440/1868787-46440889.pdf?src-supplier=Element14, ComponentLink4Description=https://datasheet.ciiva.com/7746/1738695-7746234.pdf?src-supplier=Element14, ComponentLink4URL=https://datasheet.ciiva.com/7746/1738695-7746234.pdf?src-supplier=Element14, ComponentLink5Description=https://datasheet.ciiva.com/7746/1738695-7746235.pdf?src-supplier=Element14, ComponentLink5URL=https://datasheet.ciiva.com/7746/1738695-7746235.pdf?src-supplier=Element14, ComponentLink6Description=https://datasheet.ciiva.com/22747/443971-22747516.pdf?src-supplier=Element14, ComponentLink6URL=https://datasheet.ciiva.com/22747/443971-22747516.pdf?src-supplier=Element14, ComponentLink7Description=https://datasheet.ciiva.com/7850/1018594-7850133.pdf?src-supplier=Element14, ComponentLink7URL=https://datasheet.ciiva.com/7850/1018594-7850133.pdf?src-supplier=Element14, ComponentLink8Description=https://datasheet.ciiva.com/2491/pyu-r-int-thick-7-2491207.pdf?src-supplier=Digi-Key, ComponentLink8URL=https://datasheet.ciiva.com/2491/pyu-r-int-thick-7-2491207.pdf?src-supplier=Digi-Key, ComponentLink9Description=https://datasheet.ciiva.com/2491/pyu-r-int-thick-7-2491208.pdf?src-supplier=Digi-Key, ComponentLink9URL=https://datasheet.ciiva.com/2491/pyu-r-int-thick-7-2491208.pdf?src-supplier=Digi-Key, ComponentLink10Description=https://datasheet.ciiva.com/2491/pyu-r-int-thick-7-2491209.pdf?src-supplier=Digi-Key, ComponentLink10URL=https://datasheet.ciiva.com/2491/pyu-r-int-thick-7-2491209.pdf?src-supplier=Digi-Key, ComponentLink11Description=https://datasheet.ciiva.com/17052/pyu-rc0402-51-rohs-l-6-r-17052137.pdf?src-supplier=Future+Electronics, ComponentLink11URL=https://datasheet.ciiva.com/17052/pyu-rc0402-51-rohs-l-6-r-17052137.pdf?src-supplier=Future+Electronics, ComponentLink12Description=https://datasheet.ciiva.com/12668/pyu-rc0402-51-rohs-l-6-r-12668218.pdf?src-supplier=Mouser, ComponentLink12URL=https://datasheet.ciiva.com/12668/pyu-rc0402-51-rohs-l-6-r-12668218.pdf?src-supplier=Mouser, ComponentLink13Description=https://datasheet.ciiva.com/46394/1018594-46394941.pdf?src-supplier=Element14, ComponentLink13URL=https://datasheet.ciiva.com/46394/1018594-46394941.pdf?src-supplier=Element14, Depth=0.5mm, Features="Moisture Resistant", Height=0.016inch, Lead Free="Lead Free", Length=1mm, Military Standard=Not, Number of Terminations=2, Packaging="Tape and Reel", Power Rating=63mW, Pricing 1="1 = 0.10000, 10 = 0.01200, 100 = 0.00480, 1000 = 0.00215, 2500 = 0.00186, 5000 = 0.00154 (USD)", REACH SVHC=Unknown, RoHS=Yes, Stock 1=3850330, Supplier 1=Digi-Key, Termination=SMD/SMT, Width=0.02inch
R19 R20 R21: library part RES_SMD, "RES SMD 100 OHM 1% 1/16W 0402", Case Code (Imperial)=0402, Case Code (Metric)=1005, Manufacturer 1=Yageo, Manufacturer Part Number 1=RC0402FR-07100RL, Max Operating Temperature=155°C, Max Power Dissipation=63mW, Min Operating Temperature=-55°C, Power Rating=62.5mW, Resistance Tolerance=1%, Resistor Type="Thick Film", Supplier Part Number 1=311-100LRCT-ND, Temperature Coefficient=100ppm/°C, Voltage Rating=50V, Case/Package=0402, Category="Chip SMD Resistors", Construction=Rectangular, Depth=0.5mm, Features="Moisture Resistant", Lead Free="Lead Free", Length=1mm, Military Standard=Not, Number of Pins=2, Number of Terminations=2, Packaging="Tape and Reel", Pricing 1="1=0.10000, 10=0.01600, 100=0.00660, 1000=0.00299, 2500=0.00259, 5000=0.00214 (USD)", REACH SVHC="No SVHC", Resistance=100R, RoHS=Yes, RoHS Compliant=Yes, Series=RC, Size Code=0402, Stock 1=99211, Supplier 1=Digi-Key, Technology="THICK FILM", Termination=SMD/SMT, Tolerance=1%, Voltage Rating (DC)=50V, Width=0.5mm
  R19: ComponentLink1Description=https://datasheet.ciiva.com/7849/1784430-7849810.pdf?src-supplier=Element14, ComponentLink1URL=https://datasheet.ciiva.com/7849/1784430-7849810.pdf?src-supplier=Element14, ComponentLink2Description=https://datasheet.ciiva.com/11808/0900766b80c66297-11808765.pdf?src-supplier=RSComponents, ComponentLink2URL=https://datasheet.ciiva.com/11808/0900766b80c66297-11808765.pdf?src-supplier=RSComponents, ComponentLink3Description=https://datasheet.ciiva.com/12667/pyu-rc0402-51-rohs-l-6-r-12667957.pdf?src-supplier=Mouser, ComponentLink3URL=https://datasheet.ciiva.com/12667/pyu-rc0402-51-rohs-l-6-r-12667957.pdf?src-supplier=Mouser, ComponentLink4Description=https://datasheet.ciiva.com/16740/pyu-rc0402-51-rohs-l-6-r-16740566.pdf?src-supplier=Future+Electronics, ComponentLink4URL=https://datasheet.ciiva.com/16740/pyu-rc0402-51-rohs-l-6-r-16740566.pdf?src-supplier=Future+Electronics, ComponentLink5Description=https://datasheet.ciiva.com/15189/getdatasheetpartid-329466-15189335.pdf?src-supplier=Verical, ComponentLink5URL=https://datasheet.ciiva.com/15189/getdatasheetpartid-329466-15189335.pdf?src-supplier=Verical, ComponentLink6Description=https://datasheet.ciiva.com/22747/1018594-22747511.pdf?src-supplier=Element14, ComponentLink6URL=https://datasheet.ciiva.com/22747/1018594-22747511.pdf?src-supplier=Element14, ComponentLink7Description=https://datasheet.ciiva.com/28367/1018594-28367226.pdf?src-supplier=Element14, ComponentLink7URL=https://datasheet.ciiva.com/28367/1018594-28367226.pdf?src-supplier=Element14, Contact Plating=Tin,Matte, Height=0.022inch, Radiation Hardening=No, Weight=7.1E-05oz, Working Voltage=50V
  R20: ComponentLink1Description=https://datasheet.ciiva.com/17358/pyu-rc0402-51-rohs-l-6-r-17358406.pdf?src-supplier=Future+Electronics, ComponentLink1URL=https://datasheet.ciiva.com/17358/pyu-rc0402-51-rohs-l-6-r-17358406.pdf?src-supplier=Future+Electronics, ComponentLink2Description=https://datasheet.ciiva.com/7850/1018594-7850200.pdf?src-supplier=Element14, ComponentLink2URL=https://datasheet.ciiva.com/7850/1018594-7850200.pdf?src-supplier=Element14, ComponentLink3Description=https://datasheet.ciiva.com/46394/1018594-46394968.pdf?src-supplier=Element14, ComponentLink3URL=https://datasheet.ciiva.com/46394/1018594-46394968.pdf?src-supplier=Element14, ComponentLink4Description=https://datasheet.ciiva.com/7850/1018594-7850201.pdf?src-supplier=Element14, ComponentLink4URL=https://datasheet.ciiva.com/7850/1018594-7850201.pdf?src-supplier=Element14, ComponentLink5Description=https://datasheet.ciiva.com/7983/1018594-7983579.pdf?src-supplier=Element14, ComponentLink5URL=https://datasheet.ciiva.com/7983/1018594-7983579.pdf?src-supplier=Element14, ComponentLink6Description=https://datasheet.ciiva.com/2518/pyu-r-int-thick-7-2518940.pdf?src-supplier=Digi-Key, ComponentLink6URL=https://datasheet.ciiva.com/2518/pyu-r-int-thick-7-2518940.pdf?src-supplier=Digi-Key, ComponentLink7Description=https://datasheet.ciiva.com/2518/pyu-r-int-thick-7-2518941.pdf?src-supplier=Digi-Key, ComponentLink7URL=https://datasheet.ciiva.com/2518/pyu-r-int-thick-7-2518941.pdf?src-supplier=Digi-Key, ComponentLink8Description=https://datasheet.ciiva.com/2518/pyu-r-int-thick-7-2518942.pdf?src-supplier=Digi-Key, ComponentLink8URL=https://datasheet.ciiva.com/2518/pyu-r-int-thick-7-2518942.pdf?src-supplier=Digi-Key, ComponentLink9Description=https://datasheet.ciiva.com/2452/pyu-r-int-thick-7-2452896.pdf?src-supplier=Digi-Key, ComponentLink9URL=https://datasheet.ciiva.com/2452/pyu-r-int-thick-7-2452896.pdf?src-supplier=Digi-Key, ComponentLink10Description=https://datasheet.ciiva.com/2452/pyu-r-int-thick-7-2452897.pdf?src-supplier=Digi-Key, ComponentLink10URL=https://datasheet.ciiva.com/2452/pyu-r-int-thick-7-2452897.pdf?src-supplier=Digi-Key, ComponentLink11Description=https://datasheet.ciiva.com/2452/pyu-r-int-thick-7-2452898.pdf?src-supplier=Digi-Key, ComponentLink11URL=https://datasheet.ciiva.com/2452/pyu-r-int-thick-7-2452898.pdf?src-supplier=Digi-Key, ComponentLink12Description=https://datasheet.ciiva.com/7746/1868787-7746491.pdf?src-supplier=Element14, ComponentLink12URL=https://datasheet.ciiva.com/7746/1868787-7746491.pdf?src-supplier=Element14, ComponentLink13Description=https://datasheet.ciiva.com/46395/443971-46395147.pdf?src-supplier=Element14, ComponentLink13URL=https://datasheet.ciiva.com/46395/443971-46395147.pdf?src-supplier=Element14, ComponentLink14Description=https://datasheet.ciiva.com/7746/443971-7746492.pdf?src-supplier=Element14, ComponentLink14URL=https://datasheet.ciiva.com/7746/443971-7746492.pdf?src-supplier=Element14, ComponentLink15Description=https://datasheet.ciiva.com/7849/1784430-7849810.pdf?src-supplier=Element14, ComponentLink15URL=https://datasheet.ciiva.com/7849/1784430-7849810.pdf?src-supplier=Element14, ComponentLink16Description=https://datasheet.ciiva.com/11808/0900766b80c66297-11808765.pdf?src-supplier=RSComponents, ComponentLink16URL=https://datasheet.ciiva.com/11808/0900766b80c66297-11808765.pdf?src-supplier=RSComponents, ComponentLink17Description=https://datasheet.ciiva.com/12667/pyu-rc0402-51-rohs-l-6-r-12667957.pdf?src-supplier=Mouser, ComponentLink17URL=https://datasheet.ciiva.com/12667/pyu-rc0402-51-rohs-l-6-r-12667957.pdf?src-supplier=Mouser, ComponentLink18Description=https://datasheet.ciiva.com/16740/pyu-rc0402-51-rohs-l-6-r-16740566.pdf?src-supplier=Future+Electronics, ComponentLink18URL=https://datasheet.ciiva.com/16740/pyu-rc0402-51-rohs-l-6-r-16740566.pdf?src-supplier=Future+Electronics, ComponentLink19Description=https://datasheet.ciiva.com/15189/getdatasheetpartid-329466-15189335.pdf?src-supplier=Verical, ComponentLink19URL=https://datasheet.ciiva.com/15189/getdatasheetpartid-329466-15189335.pdf?src-supplier=Verical, ComponentLink20Description=https://datasheet.ciiva.com/22747/1018594-22747511.pdf?src-supplier=Element14, ComponentLink20URL=https://datasheet.ciiva.com/22747/1018594-22747511.pdf?src-supplier=Element14, ComponentLink21Description=https://datasheet.ciiva.com/28367/1018594-28367226.pdf?src-supplier=Element14, ComponentLink21URL=https://datasheet.ciiva.com/28367/1018594-28367226.pdf?src-supplier=Element14, Height=0.022inch
  R21: ComponentLink1Description=https://datasheet.ciiva.com/2452/pyu-r-int-thick-7-2452770.pdf?src-supplier=Digi-Key, ComponentLink1URL=https://datasheet.ciiva.com/2452/pyu-r-int-thick-7-2452770.pdf?src-supplier=Digi-Key, ComponentLink2Description=https://datasheet.ciiva.com/2452/pyu-r-int-thick-7-2452771.pdf?src-supplier=Digi-Key, ComponentLink2URL=https://datasheet.ciiva.com/2452/pyu-r-int-thick-7-2452771.pdf?src-supplier=Digi-Key, ComponentLink3Description=https://datasheet.ciiva.com/2452/pyu-r-int-thick-7-2452772.pdf?src-supplier=Digi-Key, ComponentLink3URL=https://datasheet.ciiva.com/2452/pyu-r-int-thick-7-2452772.pdf?src-supplier=Digi-Key, ComponentLink4Description=https://datasheet.ciiva.com/7850/1018594-7850181.pdf?src-supplier=Element14, ComponentLink4URL=https://datasheet.ciiva.com/7850/1018594-7850181.pdf?src-supplier=Element14, ComponentLink5Description=https://datasheet.ciiva.com/46394/1018594-46394972.pdf?src-supplier=Element14, ComponentLink5URL=https://datasheet.ciiva.com/46394/1018594-46394972.pdf?src-supplier=Element14, ComponentLink6Description=https://datasheet.ciiva.com/12656/pyu-rc0402-51-rohs-l-6-r-12656926.pdf?src-supplier=Mouser, ComponentLink6URL=https://datasheet.ciiva.com/12656/pyu-rc0402-51-rohs-l-6-r-12656926.pdf?src-supplier=Mouser, ComponentLink7Description=https://datasheet.ciiva.com/15189/getdatasheetpartid-493085-15189862.pdf?src-supplier=Verical, ComponentLink7URL=https://datasheet.ciiva.com/15189/getdatasheetpartid-493085-15189862.pdf?src-supplier=Verical, ComponentLink8Description=https://datasheet.ciiva.com/7746/443971-7746471.pdf?src-supplier=Element14, ComponentLink8URL=https://datasheet.ciiva.com/7746/443971-7746471.pdf?src-supplier=Element14, ComponentLink9Description=https://datasheet.ciiva.com/46394/443971-46394999.pdf?src-supplier=Element14, ComponentLink9URL=https://datasheet.ciiva.com/46394/443971-46394999.pdf?src-supplier=Element14, ComponentLink10Description=https://datasheet.ciiva.com/7746/443971-7746472.pdf?src-supplier=Element14, ComponentLink10URL=https://datasheet.ciiva.com/7746/443971-7746472.pdf?src-supplier=Element14, ComponentLink11Description=https://datasheet.ciiva.com/7849/1784430-7849810.pdf?src-supplier=Element14, ComponentLink11URL=https://datasheet.ciiva.com/7849/1784430-7849810.pdf?src-supplier=Element14, ComponentLink12Description=https://datasheet.ciiva.com/11808/0900766b80c66297-11808765.pdf?src-supplier=RSComponents, ComponentLink12URL=https://datasheet.ciiva.com/11808/0900766b80c66297-11808765.pdf?src-supplier=RSComponents, ComponentLink13Description=https://datasheet.ciiva.com/12667/pyu-rc0402-51-rohs-l-6-r-12667957.pdf?src-supplier=Mouser, ComponentLink13URL=https://datasheet.ciiva.com/12667/pyu-rc0402-51-rohs-l-6-r-12667957.pdf?src-supplier=Mouser, ComponentLink14Description=https://datasheet.ciiva.com/16740/pyu-rc0402-51-rohs-l-6-r-16740566.pdf?src-supplier=Future+Electronics, ComponentLink14URL=https://datasheet.ciiva.com/16740/pyu-rc0402-51-rohs-l-6-r-16740566.pdf?src-supplier=Future+Electronics, ComponentLink15Description=https://datasheet.ciiva.com/15189/getdatasheetpartid-329466-15189335.pdf?src-supplier=Verical, ComponentLink15URL=https://datasheet.ciiva.com/15189/getdatasheetpartid-329466-15189335.pdf?src-supplier=Verical, ComponentLink16Description=https://datasheet.ciiva.com/22747/1018594-22747511.pdf?src-supplier=Element14, ComponentLink16URL=https://datasheet.ciiva.com/22747/1018594-22747511.pdf?src-supplier=Element14, ComponentLink17Description=https://datasheet.ciiva.com/28367/1018594-28367226.pdf?src-supplier=Element14, ComponentLink17URL=https://datasheet.ciiva.com/28367/1018594-28367226.pdf?src-supplier=Element14, Composition="Thick Film", Height=0.32mm